# Altium PCB MAGI'sUSBASP.PcbDoc
Units mm, origin at the board's own origin, x right, y up, seen from the top; angles counter-clockwise.
Board outline 152.4 x 101.6 mm, 2 copper layers (Top Layer, Bottom Layer); 23 components, 22 nets, 105 pads, 26 vias.
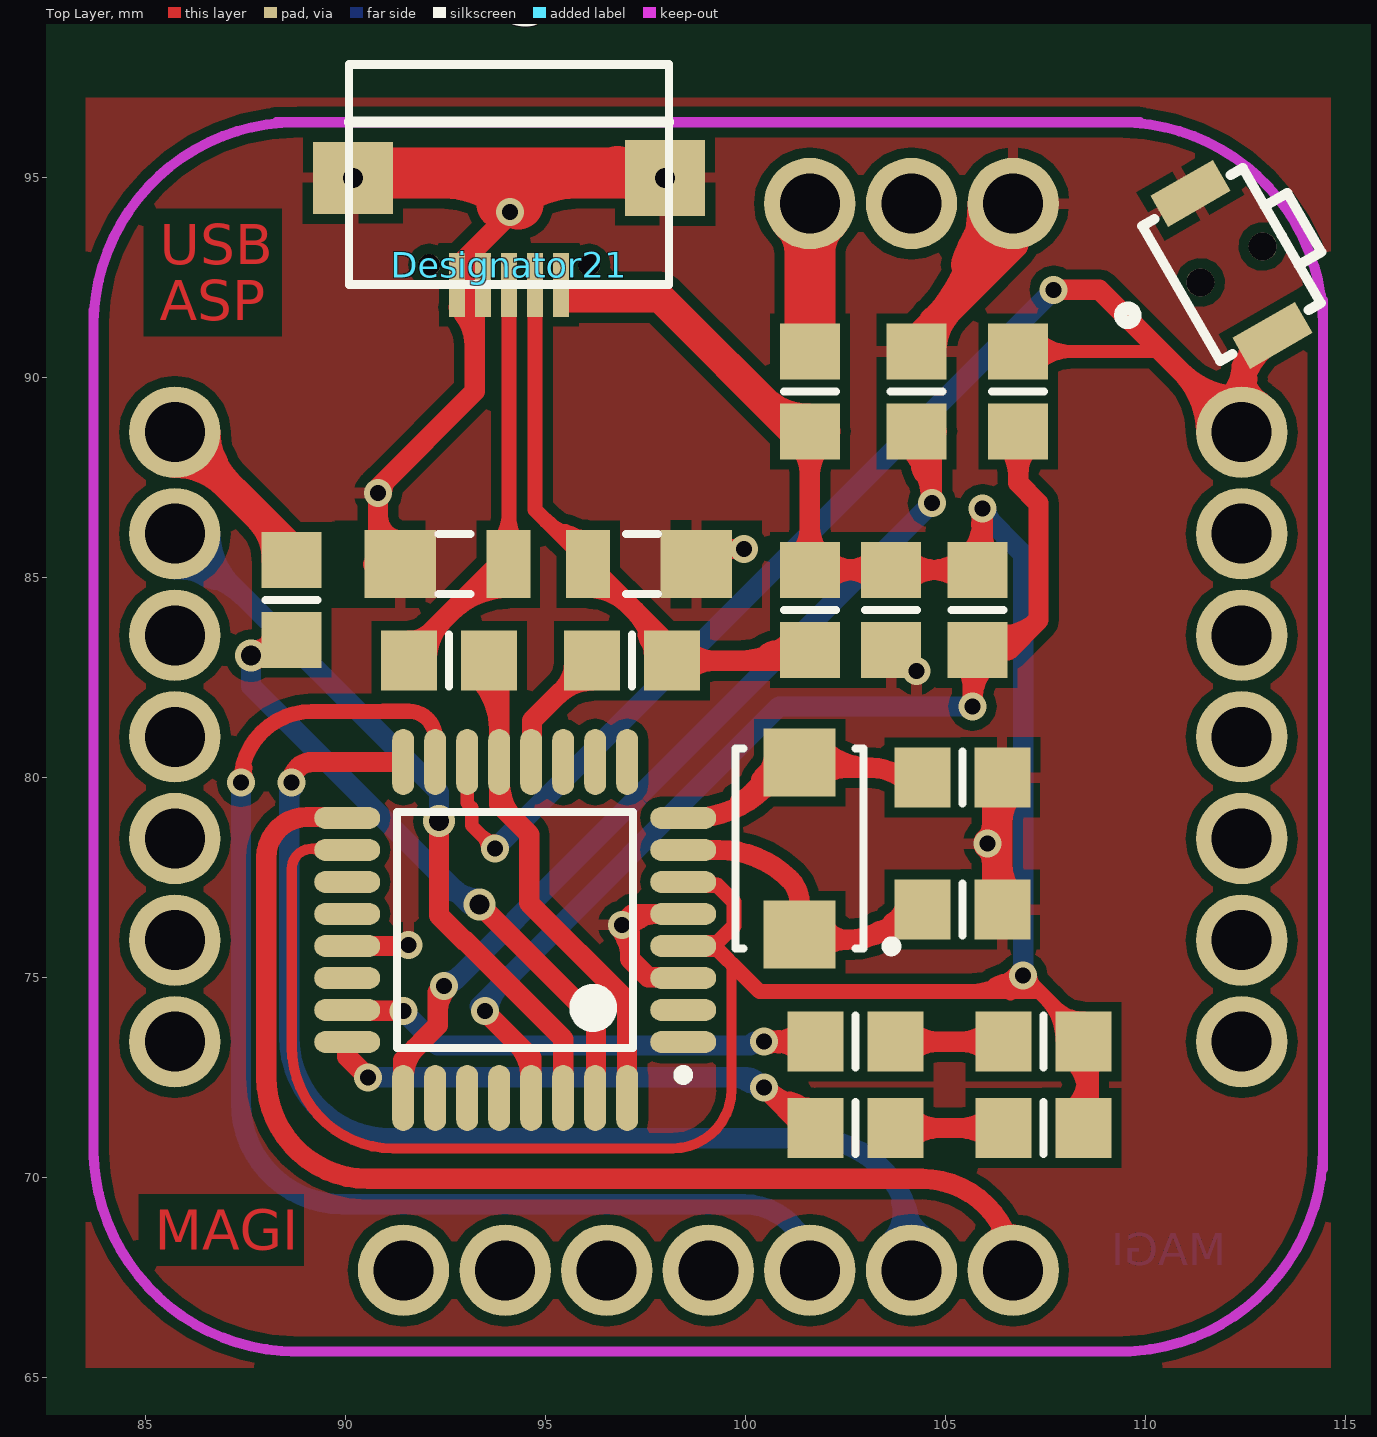
[diagram p0: Top Layer view]
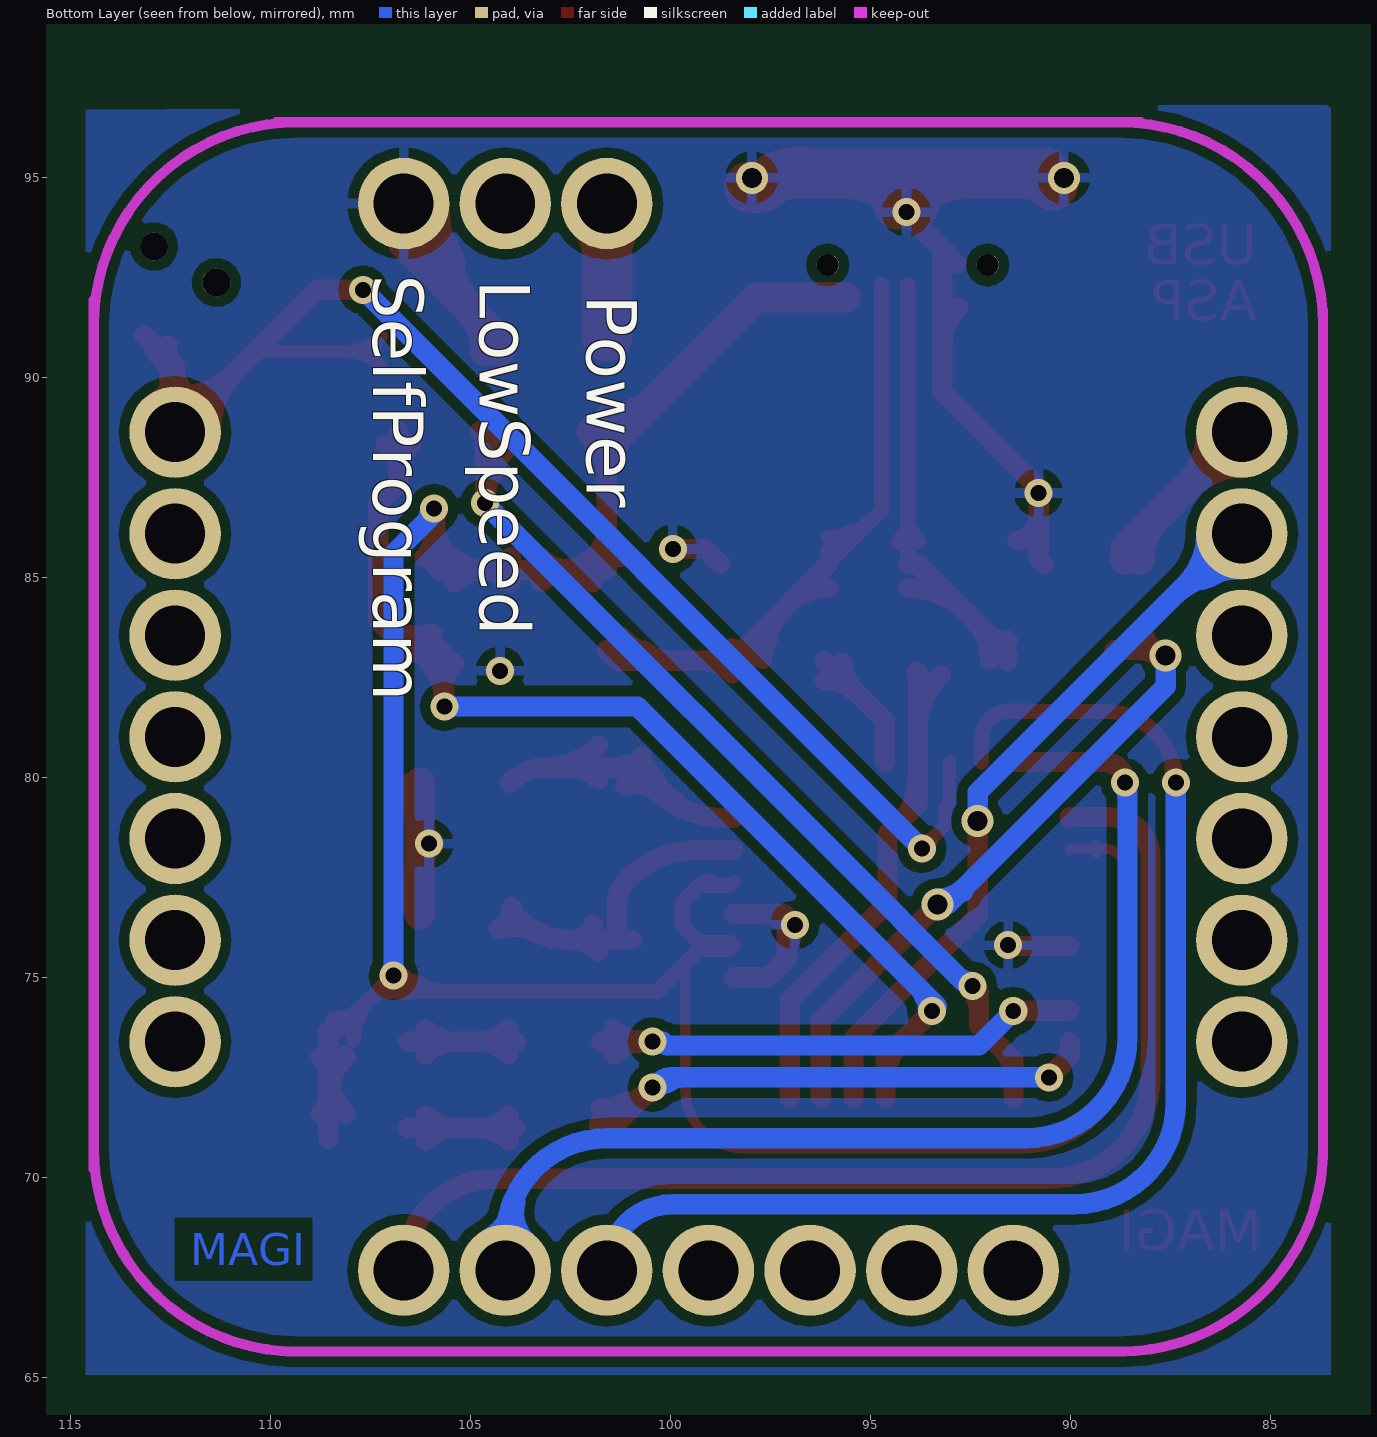
[diagram p1: Bottom Layer view, seen from below]

## Layer stack, top to bottom
Top Solder: solder mask 0.0102, Solder Resist, Dk 3.5
Top Layer: signal copper 0.0356
Dielectric1: dielectric 0.32, FR-4, Dk 4.8
Bottom Layer: signal copper 0.0356
Bottom Solder: solder mask 0.0102, Solder Resist, Dk 3.5

## Board outline
25.4,25.4 177.8,25.4 177.8,127 25.4,127

## Design rules (kind name [scope] priority, off if disabled: settings)
Clearance [All] p1: gap=0.254
PolygonConnect [All] p1: connectstyle=Relief reliefconductorwidth=0.254 reliefentries=4 polygonreliefangle="90 Angle" airgapwidth=0.254
RoutingVias [All] p1: holewidth=0.711 width=1.27 viastyle="Through Hole" minholewidth=0.025 minwidth=0.025 maxholewidth=2.54 maxwidth=2.54
SolderMaskExpansion [All] p1: expansion=0.102
Width [All] p1: maxlimit=2.54 minlimit=0.254 preferedwidth=0.762
29 further rules are at their usual default settings.

## Classes and differential pairs
component class usbasp: C1 C2 C3 J1 J2 J3 LED1 LED2 R0 R1 R2 R3 R4 R5 R6 R7 U1 Y1 ZD1 ZD2

## Components (designator, comment, footprint, x,y, rotation, side; value= is the part's Value field where it differs from the comment)
C1 "CAP_1" 6-0805_M 105.41,80.01 r180 top
C2 "CAP_1" 6-0805_M 105.41,76.708 r180 top
C3 "CAP_1" 6-0805_M 103.632,84.201 r90 top
Designator21 "Comment" MicroUSB#1 94.08,92.925 r0 top
J1 "CON2" 6-0805_M 104.267,89.662 r90 top
J2 "CON2" 6-0805_M 106.807,89.662 r270 top
J3 "MAGI-M8" MAGI-M8 99.06,81.026 r0 top
LED1 "LED_1" 6-0805_M 107.442,73.406 r180 top
LED2 "LED_1" 6-0805_M 107.442,71.247 r180 top
R0 "RES1" 6-0805_M 101.6,89.662 r270 top
R1 "RES1" 6-0805_M 102.743,73.406 r0 top
R2 "RES1" 6-0805_M 102.743,71.247 r0 top
R3 "RES1" 6-0805_M 105.791,84.201 r90 top
R4 "RES1" 6-0805_M 88.646,84.455 r90 top
R5 "RES1" 6-0805_M 92.583,82.931 r0 top
R6 "RES1" 6-0805_M 97.155,82.931 r180 top
R7 "RES1" 6-0805_M 101.6,84.201 r90 top
RESETButton "" SKRELGE010 112.141,92.837 r120 top
U1 "ATmega8A-AU" 32A_N 94.234,76.2 r180 top
Y1 "CRYSTAL" 4SMX 101.346,78.232 r90 top
ZD1 "DIODE SCHOTTKY_1" C1206 92.71,85.344 r0 top
ZD2 "DIODE SCHOTTKY_1" C1206 97.409,85.344 r180 top
? "Comment" MicroUSB#2 94.234,94.869 r0 top

## Footprints (in the part's own frame and the unit in brackets; to place one, negate y for a bottom-side part, rotate by r counter-clockwise, add the part's x,y. Pads: shape width x height; smd on the part's side, far side on the other; paste and mask are expansions set on the pad)
4SMX [mm] "Quartz Crystal, SM; Body 5.2 x 3.4 mm (LxW max)"
  rect 1.7x1.8 smd: 1(-2.15,0) 2(2.15,0)
  silkscreen extent -2.57,-2.42 2.5,1.6
6-0805_M [mm] "Chip Resistor, Body 2.0x1.2mm, IPC Low Density"
  rect 1.4x1.5 smd: 1(-1,0) 2(1,0)
  silkscreen extent 0,-0.65 0,0.65, body extent -1.07,-0.7 1.07,0.7, height 0.7
32A_N [mm] "Thin QFP, 32-Leads, Body 7x7mm, Pitch 0.8mm, IPC Medium Density"
  oval 1.65x0.55 smd: 1(-4.2,2.8) 2(-4.2,2) 3(-4.2,1.2) 4(-4.2,0.4) 5(-4.2,-0.4) 6(-4.2,-1.2) 7(-4.2,-2) 8(-4.2,-2.8) 17(4.2,-2.8) 18(4.2,-2) 19(4.2,-1.2) 20(4.2,-0.4) 21(4.2,0.4) 22(4.2,1.2) 23(4.2,2) 24(4.2,2.8)
  oval 0.55x1.65 smd: 9(-2.8,-4.2) 10(-2,-4.2) 11(-1.2,-4.2) 12(-0.4,-4.2) 13(0.4,-4.2) 14(1.2,-4.2) 15(2,-4.2) 16(2.8,-4.2) 25(2.8,4.2) 26(2,4.2) 27(1.2,4.2) 28(0.4,4.2) 29(-0.4,4.2) 30(-1.2,4.2) 31(-2,4.2) 32(-2.8,4.2)
  silkscreen extent -4.33,-2.95 2.95,3.75, body extent -3.5,-3.5 3.5,3.5, height 1.2
C1206 [mm] "Chip Capacitor, Body 3.2x1.6mm, IPC High Density"
  rect 1.778x1.7 smd: 1(-1.35,0)
  rect 1.1x1.7 smd: 2(1.35,0)
  silkscreen extent -0.4,-0.75 0.4,0.75, body extent -1.7,-0.9 1.7,0.9, height 1.3
MAGI-M8 [mil]
  round 90 hole 59.06: 1(300,525) 2(200,525) 3(100,525) 8(-525,300) 9(-525,200) 10(-525,100) 11(-525,0) 12(-525,-100) 13(-525,-200) 14(-525,-300) 15(-300,-525) 16(-200,-525) 17(-100,-525) 18(0,-525) 19(100,-525) 20(200,-525) 21(300,-525) 22(525,-300) 23(525,-200) 24(525,-100) 25(525,0) 26(525,100) 27(525,200) 28(525,300)
  Keep-Out Layer lines w10: -605,-415 -605,290 -605,420 ; -605,-405 ccw(c-405,-405) -405,-605 ; -605,405 cw(c-405,405) -405,605 ; -425,605 425,605 ; -410,-605 415,-605 ; 405,-605 ccw(c405,-405) 605,-405 ; 405,605 cw(c405,405) 605,405 ; 605,-425 605,430
MicroUSB#1 [mm]
  round 0.55 hole 0.55: 0(-2,-0.1) 0(2,-0.1)
  silkscreen extent -4,-0.58 4,4.92, body extent -4.1,-0.68 4.1,5.02, height 3
MicroUSB#2 [mm]
  rect 0.4x1.6 smd: 1(1.143,-2.54) 2(0.493,-2.54) 3(-0.157,-2.54) 4(-0.807,-2.54) 5(-1.457,-2.54)
  rect 2x1.8 smd: 6(-4.057,0.135)
  rect 2x1.9 smd: 7(3.743,0.135)
  silkscreen extent -4.16,-2.54 3.84,2.96, body extent -4.26,-2.64 3.94,3.06, height 3
SKRELGE010 [mm]
  round 0.7 hole 0.7: 0(0,-0.9) 0(0,0.9)
  rect 0.9x1.8 smd: 1(-2.05,0) 2(2.05,0)
  silkscreen extent -1.95,-2.1 1.95,1.45

## Part data
C1 C2 C3: "Capacitor"
J1 J2: "Connector"
RESETButton: library part CON2, "Connector"
U1: "8-bit AVR Microcontroller, 8KB Flash, 512 Bytes EEPROM, 1KB SRAM, 32-pin TQFP, Industrial Grade (-40癈 to 85癈)"
Y1: "Crystal"
ZD1 ZD2: "Schottky Diode"

## Via types
v1: diameter 0.7, hole 0.4, Top Layer to Bottom Layer, 21 vias
v2: diameter 0.8, hole 0.5, Top Layer to Bottom Layer, 5 vias

## Nets (pads, with @x,y where several pads share a name; then routed paths per layer and width w, separated by ;. In a path a pad name is that pad's centre, name@x,y a point inside that pad or via, vN(x,y) a via of type N, cw(c..) or ccw(c..) an arc to the next point about the centre after c; other vN are vias at no path point)
GND: ?.4 ?.5 ?.6 ?.7 C1.1 C2.1 C3.1 J1.2 J3.1 RESETButton.2 U1.3 U1.5 U1.21 ZD1.1 ZD2.1 | length 116.2
  Top Layer w0.508: U1.21 91.421,75.8 91.44,75.819 v1(91.567,75.819) ; ZD1.1@90.678,85.344 90.805,85.471 v1(90.805,87.122) 90.805,87.249 93.218,89.662 93.218,93.218 ; ?.5@92.86,92.86 93.218,93.218 ; 95.123,95.123 93.218,93.218 ; U1.3 98.417,75.017 97.56,75.017 97.101,75.476 97.101,76.127 v1(96.901,76.327) 97.174,76.6 U1.5 ; ZD2.1 99.14,85.725 v1(99.949,85.725) ; 90.805,86.542 ccw(c91.413,86.542) ZD1.1@91.333,85.939 ; 90.805,86.542 ccw(c91.413,86.542) ZD1.1@91.333,85.939 ; 90.805,86.542 ccw(c91.413,86.542) ZD1.1@91.333,85.939 ; v1@90.901,87.122 cw(c91.439,87.122) 91.059,87.503 ; v1@90.901,87.122 cw(c91.439,87.122) 91.059,87.503 ; v1@90.901,87.122 cw(c91.439,87.122) 91.059,87.503 ; ?.5@92.815,91.767 cw(c91.843,90.795) 93.218,90.795 ; ?.5@92.815,91.767 cw(c91.843,90.795) 93.218,90.795 ; ?.5@92.815,91.767 cw(c91.843,90.795) 93.218,90.795 ; v1@96.833,76.259 cw(c96.186,75.612) 97.101,75.612 ; v1@96.833,76.259 cw(c96.186,75.612) 97.101,75.612 ; v1@96.833,76.259 cw(c96.186,75.612) 97.101,75.612 ; v1@96.926,76.42 ccw(c97.068,76.949) 97.342,76.475 ; v1@96.926,76.42 ccw(c97.068,76.949) 97.342,76.475 ; v1@96.926,76.42 ccw(c97.068,76.949) 97.342,76.475 ; v1@96.969,76.259 cw(c97.792,75.436) U1.5@97.792,76.6 ; v1@96.969,76.259 cw(c97.792,75.436) U1.5@97.792,76.6 ; v1@96.969,76.259 cw(c97.792,75.436) U1.5@97.792,76.6 ; v1@96.993,76.301 ccw(c97.495,76.157) 97.043,75.896 ; v1@96.993,76.301 ccw(c97.495,76.157) 97.043,75.896 ; v1@96.993,76.301 ccw(c97.495,76.157) 97.043,75.896
  Top Layer w0.762: J1.2 104.267,90.932 106.68,93.345 J3.1 ; J3.1@105.947,94.154 cw(c105.245,93.957) 105.76,93.441 cw(c106.276,92.926) J3.1@106.473,93.628 ; C2.1@106.283,76.581 C1.1@106.283,79.883 ; J1.2@104.625,90.745 cw(c105.482,90.974) 104.714,91.417 ; J1.2@104.625,90.745 cw(c105.482,90.974) 104.714,91.417 ; J1.2@104.625,90.745 cw(c105.482,90.974) 104.714,91.417 ; J1.2@104.636,90.662 cw(c106.179,90.662) 105.088,91.753 ; J1.2@104.636,90.662 cw(c106.179,90.662) 105.088,91.753 ; J1.2@104.636,90.662 cw(c106.179,90.662) 105.088,91.753 ; J1.2@104.661,91.326 ccw(c101.626,94.361) J3.1@105.918,94.361 ; J1.2@104.661,91.326 ccw(c101.626,94.361) J3.1@105.918,94.361 ; J1.2@104.661,91.326 ccw(c101.626,94.361) J3.1@105.918,94.361 ; 105.509,92.835 cw(c107.936,92.185) J3.1 ; 105.509,92.835 cw(c107.936,92.185) J3.1 ; 105.509,92.835 cw(c107.936,92.185) J3.1 ; 105.962,92.627 ccw(c104.227,94.361) J3.1 ; 105.962,92.627 ccw(c104.227,94.361) J3.1 ; 105.962,92.627 ccw(c104.227,94.361) J3.1 ; v1@106.067,78.337 ccw(c105.545,78.859) 106.283,78.859 ; v1@106.067,78.337 ccw(c105.545,78.859) 106.283,78.859 ; v1@106.067,78.337 ccw(c105.545,78.859) 106.283,78.859 ; v1@106.067,78.381 cw(c105.545,77.859) 106.283,77.859 ; v1@106.067,78.381 cw(c105.545,77.859) 106.283,77.859 ; v1@106.067,78.381 cw(c105.545,77.859) 106.283,77.859 ; J3.1@106.16,93.804 cw(c105.698,93.31) 106.351,93.135 ; J3.1@106.16,93.804 cw(c105.698,93.31) 106.351,93.135 ; J3.1@106.16,93.804 cw(c105.698,93.31) 106.351,93.135 ; 106.283,77.835 ccw(c107.487,77.835) C2.1@106.636,76.984 ; 106.283,77.835 ccw(c107.487,77.835) C2.1@106.636,76.984 ; 106.283,77.835 ccw(c107.487,77.835) C2.1@106.636,76.984 ; 106.283,78.883 cw(c107.487,78.883) C1.1@106.636,79.734 ; 106.283,78.883 cw(c107.487,78.883) C1.1@106.636,79.734 ; 106.283,78.883 cw(c107.487,78.883) C1.1@106.636,79.734 ; 106.351,93.135 cw(c107.005,92.959) J3.1@106.852,93.619 ; 106.351,93.135 cw(c107.005,92.959) J3.1@106.852,93.619 ; 106.351,93.135 cw(c107.005,92.959) J3.1@106.852,93.619
  Top Layer w1.27: ?.6@90.637,95.123 96.756,95.123 ccw(c96.756,95.159) 96.792,95.159 ; ?.6@90.464,94.817 cw(c91.204,94.077) 91.204,95.123 ; ?.6@90.464,94.817 cw(c91.204,94.077) 91.204,95.123 ; ?.6@90.464,94.817 cw(c91.204,94.077) 91.204,95.123 ; 92.429,95.123 cw(c92.429,92.465) v1@94.309,94.345 ; 92.429,95.123 cw(c92.429,92.465) v1@94.309,94.345 ; 92.429,95.123 cw(c92.429,92.465) v1@94.309,94.345 ; v1@93.905,94.345 cw(c95.785,92.465) 95.785,95.123 ; v1@93.905,94.345 cw(c95.785,92.465) 95.785,95.123 ; v1@93.905,94.345 cw(c95.785,92.465) 95.785,95.123 ; 96.879,95.123 cw(c96.879,93.956) ?.7@97.704,94.781 ; 96.879,95.123 cw(c96.879,93.956) ?.7@97.704,94.781 ; 96.879,95.123 cw(c96.879,93.956) ?.7@97.704,94.781 ; 96.879,95.123 cw(c96.879,93.956) ?.7@97.704,94.781 ; 96.879,95.123 cw(c96.879,93.956) ?.7@97.704,94.781 ; 96.879,95.123 cw(c96.879,93.956) ?.7@97.704,94.781 ; ?.7@97.615,94.833 ccw(c97.894,95.315) ?.7@98.038,94.777 ; ?.7@97.615,94.833 ccw(c97.894,95.315) ?.7@98.038,94.777 ; ?.7@97.615,94.833 ccw(c97.894,95.315) ?.7@98.038,94.777 ; ?.7@97.615,94.833 ccw(c97.894,95.315) ?.7@98.038,94.777 ; ?.7@97.615,94.833 ccw(c97.894,95.315) ?.7@98.038,94.777 ; ?.7@97.615,94.833 ccw(c97.894,95.315) ?.7@98.038,94.777 ; ?.7@97.615,94.833 ccw(c97.894,95.315) ?.7@98.038,94.777 ; ?.7@97.615,94.833 ccw(c97.894,95.315) ?.7@98.038,94.777 ; ?.7@97.615,94.833 ccw(c97.894,95.315) ?.7@98.038,94.777 ; ?.7@97.615,94.833 ccw(c97.894,95.315) ?.7@98.038,94.777 ; ?.7@97.615,94.833 ccw(c97.894,95.315) ?.7@98.038,94.777 ; ?.7@97.615,94.833 ccw(c97.894,95.315) ?.7@98.038,94.777
  other v1: 106.045,78.359 104.267,82.677 94.107,94.143
  other v2: 90.177,95.004 97.977,95.004
MISO: J3.20 U1.16 | length 36.4
  Top Layer w0.508: v1(88.646,79.883) cw(c89.163,79.883) 89.163,80.4 U1.16
  Bottom Layer w0.508: v1@88.582,79.742 88.582,73.533 ccw(c91.123,73.533) 91.123,70.993 101.6,70.993 cw(c101.6,68.453) 104.14,68.453 J3.20 ; 88.582,79.498 cw(c89.031,79.498) v1@88.714,79.815 ; 88.582,79.498 cw(c89.031,79.498) v1@88.714,79.815 ; 88.582,79.498 cw(c89.031,79.498) v1@88.714,79.815 ; J3.20@103.567,68.371 ccw(c102.923,69.134) 103.888,69.393 ; J3.20@103.567,68.371 ccw(c102.923,69.134) 103.888,69.393 ; J3.20@103.567,68.371 ccw(c102.923,69.134) 103.888,69.393 ; 103.898,69.355 ccw(c105.321,69.736) J3.20@104.584,68.461 ; 103.898,69.355 ccw(c105.321,69.736) J3.20@104.584,68.461 ; 103.898,69.355 ccw(c105.321,69.736) J3.20@104.584,68.461
MOSI: J3.19 U1.15 | length 33.7
  Top Layer w0.381: v1(87.376,79.883) cw(c89.154,79.883) 89.154,81.661 91.313,81.661 ; 90.932,81.669 91.567,81.669 cw(c91.567,81.002) 92.234,81.002 U1.15 ; v1@87.296,80.021 ccw(c87.104,80.355) 87.476,80.255 ; v1@87.296,80.021 ccw(c87.104,80.355) 87.476,80.255 ; v1@87.296,80.021 ccw(c87.104,80.355) 87.476,80.255 ; 87.476,80.255 ccw(c87.848,80.155) v1@87.514,79.963 ; 87.476,80.255 ccw(c87.848,80.155) v1@87.514,79.963 ; 87.476,80.255 ccw(c87.848,80.155) v1@87.514,79.963
  Bottom Layer w0.508: v1(87.376,79.883) 87.376,71.882 ccw(c89.916,71.882) 89.916,69.342 99.949,69.342 cw(c99.949,67.691) J3.19
NetC1_2: C1.2 U1.8 Y1.2 | length 22
  Top Layer w0.508: U1.8 98.658,79 ccw(c98.658,81.54) Y1.2@100.454,79.744 ; Y1.2@100.965,80.255 103.131,80.255 ; C1.2@104.029,79.883 ccw(c103.131,78.985) 103.131,80.255 ; 99.841,79.39 ccw(c98.897,81.025) Y1.2@100.72,80.536 ; 99.841,79.39 ccw(c98.897,81.025) Y1.2@100.72,80.536 ; 99.841,79.39 ccw(c98.897,81.025) Y1.2@100.72,80.536 ; 100.383,79.952 cw(c101.043,79.571) Y1.2@101.27,80.298 ; 100.383,79.952 cw(c101.043,79.571) Y1.2@101.27,80.298 ; 100.383,79.952 cw(c101.043,79.571) Y1.2@101.27,80.298 ; 100.391,79.707 cw(c100.886,78.85) Y1.2@101.142,79.806 ; 100.391,79.707 cw(c100.886,78.85) Y1.2@101.142,79.806 ; 100.391,79.707 cw(c100.886,78.85) Y1.2@101.142,79.806 ; Y1.2@101.817,79.961 cw(c102.528,79.25) 102.528,80.255 ; Y1.2@101.817,79.961 cw(c102.528,79.25) 102.528,80.255 ; Y1.2@101.817,79.961 cw(c102.528,79.25) 102.528,80.255 ; Y1.2@101.819,80.802 ccw(c103.131,82.102) 103.131,80.255 ; Y1.2@101.819,80.802 ccw(c103.131,82.102) 103.131,80.255 ; Y1.2@101.819,80.802 ccw(c103.131,82.102) 103.131,80.255
NetC2_2: C2.2 U1.7 Y1.1 | length 19.2
  Top Layer w0.508: U1.7 99.33,78.2 cw(c99.33,75.708) 101.092,77.47 cw(c100.479,76.857) 101.346,76.857 Y1.1 ; Y1.1@100.965,75.955 102.518,75.955 ; C2.2@104.029,76.581 cw(c102.518,78.092) 102.518,75.955 ; Y1.1@101.82,75.663 cw(c102.518,74.975) 102.518,75.955 ; Y1.1@101.82,75.663 cw(c102.518,74.975) 102.518,75.955 ; Y1.1@101.82,75.663 cw(c102.518,74.975) 102.518,75.955 ; Y1.1@101.939,76.328 ccw(c102.518,76.591) 102.518,75.955 ; Y1.1@101.939,76.328 ccw(c102.518,76.591) 102.518,75.955 ; Y1.1@101.939,76.328 ccw(c102.518,76.591) 102.518,75.955 ; 103.157,76.077 cw(c103.906,74.779) C2.2@104.295,76.227 ; 103.157,76.077 cw(c103.906,74.779) C2.2@104.295,76.227 ; 103.157,76.077 cw(c103.906,74.779) C2.2@104.295,76.227 ; 103.518,76.227 ccw(c103.518,76.673) C2.2@103.964,76.665 ; 103.518,76.227 ccw(c103.518,76.673) C2.2@103.964,76.665 ; 103.518,76.227 ccw(c103.518,76.673) C2.2@103.964,76.665 ; 103.674,76.376 ccw(c103.347,76.943) C2.2@103.979,76.773 ; 103.674,76.376 ccw(c103.347,76.943) C2.2@103.979,76.773 ; 103.674,76.376 ccw(c103.347,76.943) C2.2@103.979,76.773
NetJ1_1: J1.1 U1.25 | length 36.3
  Top Layer w0.508: U1.25 91.434,72.949 92.298,73.813 92.298,74.645 v1@92.329,74.676 ; U1.25@91.455,72.55 cw(c92.468,72.55) 91.752,73.266 ; v1(104.648,86.868) 104.648,88.535 J1.1@104.775,88.662 ; 92.298,74.19 cw(c93.069,74.19) v1@92.524,74.735 ; 92.298,74.19 cw(c93.069,74.19) v1@92.524,74.735 ; 92.298,74.19 cw(c93.069,74.19) v1@92.524,74.735 ; 92.351,74.436 ccw(c92.038,74.617) v1@92.368,74.764 ; 92.351,74.436 ccw(c92.038,74.617) v1@92.368,74.764 ; 92.351,74.436 ccw(c92.038,74.617) v1@92.368,74.764 ; J1.1@104.008,88.34 cw(c102.564,86.838) v1@104.648,86.838 ; J1.1@104.008,88.34 cw(c102.564,86.838) v1@104.648,86.838 ; J1.1@104.008,88.34 cw(c102.564,86.838) v1@104.648,86.838 ; J1.1@104.36,88.707 cw(c103.71,88.03) J1.1@104.648,88.03 ; J1.1@104.36,88.707 cw(c103.71,88.03) J1.1@104.648,88.03 ; J1.1@104.36,88.707 cw(c103.71,88.03) J1.1@104.648,88.03 ; 104.449,87.611 cw(c104.899,87.883) J1.1@104.584,88.305 ; 104.449,87.611 cw(c104.899,87.883) J1.1@104.584,88.305 ; 104.449,87.611 cw(c104.899,87.883) J1.1@104.584,88.305
  Bottom Layer w0.508: v1@92.717,74.93 94.246,76.459 94.246,76.466 v1(104.648,86.868) ; v1@92.456,74.899 ccw(c92.456,75.454) 92.849,75.062 ; v1@92.456,74.899 ccw(c92.456,75.454) 92.849,75.062 ; v1@92.456,74.899 ccw(c92.456,75.454) 92.849,75.062
  other v1: 92.456,74.803
NetJ2_2: J2.2 R3.1 U1.29 | length 50.2
  Top Layer w0.508: v1(93.472,74.168) 94.634,73.006 U1.29 ; 94.276,73.364 cw(c93.461,72.55) U1.29@94.613,72.55 ; v1(105.664,81.788) 105.664,83.074 R3.1 ; 106.553,83.185 107.315,83.947 ; J2.2 106.807,87.376 107.315,86.868 107.315,83.947 ; R3.1@105.426,82.886 cw(c104.85,82.31) 105.664,82.31 ; R3.1@105.426,82.886 cw(c104.85,82.31) 105.664,82.31 ; R3.1@105.426,82.886 cw(c104.85,82.31) 105.664,82.31 ; v1@105.664,81.938 cw(c107.004,81.938) R3.1@106.056,82.886 ; v1@105.664,81.938 cw(c107.004,81.938) R3.1@106.056,82.886 ; v1@105.664,81.938 cw(c107.004,81.938) R3.1@106.056,82.886 ; R3.1@105.799,83.247 cw(c106.685,82.266) 106.752,83.586 ; R3.1@105.799,83.247 cw(c106.685,82.266) 106.752,83.586 ; R3.1@105.799,83.247 cw(c106.685,82.266) 106.752,83.586 ; R3.1@105.822,83.142 ccw(c106.097,83.991) 106.728,83.36 ; R3.1@105.822,83.142 ccw(c106.097,83.991) 106.728,83.36 ; R3.1@105.822,83.142 ccw(c106.097,83.991) 106.728,83.36 ; R3.1@105.978,83.625 ccw(c106.384,84.878) 107.315,83.947 ; R3.1@105.978,83.625 ccw(c106.384,84.878) 107.315,83.947 ; R3.1@105.978,83.625 ccw(c106.384,84.878) 107.315,83.947 ; J2.2@106.492,88.347 cw(c105.73,87.585) 106.807,87.585 ; J2.2@106.492,88.347 cw(c105.73,87.585) 106.807,87.585 ; J2.2@106.492,88.347 cw(c105.73,87.585) 106.807,87.585 ; 106.807,87.585 cw(c107.884,87.585) J2.2@107.122,88.347 ; 106.807,87.585 cw(c107.884,87.585) J2.2@107.122,88.347 ; 106.807,87.585 cw(c107.884,87.585) J2.2@107.122,88.347
  Bottom Layer w0.508: v1(93.472,74.168) 93.345,74.295 100.838,81.788 v1@105.41,81.788 ; v1@93.424,74.251 ccw(c93.15,74.726) 93.679,74.584 ; v1@93.424,74.251 ccw(c93.15,74.726) 93.679,74.584 ; v1@93.424,74.251 ccw(c93.15,74.726) 93.679,74.584 ; v1@93.568,74.168 cw(c94.413,74.168) 93.815,74.765 ; v1@93.568,74.168 cw(c94.413,74.168) 93.815,74.765 ; v1@93.568,74.168 cw(c94.413,74.168) 93.815,74.765
NetJ3_3: J3.3 R0.1 | length 9.1
  Top Layer w1.27: R0.1@101.6,91.043 J3.3 ; J3.3@101.241,94.002 cw(c100.374,93.135) 101.6,93.135 ; J3.3@101.241,94.002 cw(c100.374,93.135) 101.6,93.135 ; J3.3@101.241,94.002 cw(c100.374,93.135) 101.6,93.135 ; 101.6,93.135 cw(c102.826,93.135) J3.3@101.959,94.002 ; 101.6,93.135 cw(c102.826,93.135) J3.3@101.959,94.002 ; 101.6,93.135 cw(c102.826,93.135) J3.3@101.959,94.002
NetLED1_2: LED1.2 R1.2 | length 12.8
  Top Layer w0.508: R1.2@103.87,73.406 LED1.2@106.569,73.406 ; R1.2@104.058,73.091 cw(c104.82,72.329) 104.82,73.406 ; R1.2@104.058,73.091 cw(c104.82,72.329) 104.82,73.406 ; R1.2@104.058,73.091 cw(c104.82,72.329) 104.82,73.406 ; R1.2@104.058,73.721 ccw(c104.82,74.483) 104.82,73.406 ; R1.2@104.058,73.721 ccw(c104.82,74.483) 104.82,73.406 ; R1.2@104.058,73.721 ccw(c104.82,74.483) 104.82,73.406 ; 105.365,73.406 cw(c105.365,72.329) LED1.2@106.127,73.091 ; 105.365,73.406 ccw(c105.365,74.483) LED1.2@106.127,73.721 ; 105.365,73.406 cw(c105.365,72.329) LED1.2@106.127,73.091 ; 105.365,73.406 ccw(c105.365,74.483) LED1.2@106.127,73.721 ; 105.365,73.406 ccw(c105.365,74.483) LED1.2@106.127,73.721 ; 105.365,73.406 cw(c105.365,72.329) LED1.2@106.127,73.091
NetLED2_2: LED2.2 R2.2 | length 12.8
  Top Layer w0.508: R2.2@103.87,71.247 LED2.2@106.569,71.247 ; R2.2@104.058,70.932 cw(c104.82,70.17) 104.82,71.247 ; R2.2@104.058,70.932 cw(c104.82,70.17) 104.82,71.247 ; R2.2@104.058,70.932 cw(c104.82,70.17) 104.82,71.247 ; R2.2@104.058,71.562 ccw(c104.82,72.324) 104.82,71.247 ; R2.2@104.058,71.562 ccw(c104.82,72.324) 104.82,71.247 ; R2.2@104.058,71.562 ccw(c104.82,72.324) 104.82,71.247 ; 105.365,71.247 cw(c105.365,70.17) LED2.2@106.127,70.932 ; 105.365,71.247 ccw(c105.365,72.324) LED2.2@106.127,71.562 ; 105.365,71.247 cw(c105.365,70.17) LED2.2@106.127,70.932 ; 105.365,71.247 ccw(c105.365,72.324) LED2.2@106.127,71.562 ; 105.365,71.247 ccw(c105.365,72.324) LED2.2@106.127,71.562 ; 105.365,71.247 cw(c105.365,70.17) LED2.2@106.127,70.932
NetR1_1: R1.1 U1.23 | length 22.4
  Top Layer w0.508: U1.23 90.051,74.183 91.425,74.183 v1(91.44,74.168) ; v1(100.457,73.406) R1.1 ; v1@100.505,73.323 cw(c100.713,72.962) 100.821,73.364 ; v1@100.505,73.323 cw(c100.713,72.962) 100.821,73.364 ; v1@100.505,73.323 cw(c100.713,72.962) 100.821,73.364 ; v1@100.505,73.323 cw(c100.713,72.962) 100.821,73.364 ; v1@100.505,73.323 cw(c100.713,72.962) 100.821,73.364 ; v1@100.505,73.323 cw(c100.713,72.962) 100.821,73.364 ; v1@100.505,73.489 ccw(c100.713,73.85) 100.821,73.448 ; v1@100.505,73.489 ccw(c100.713,73.85) 100.821,73.448 ; v1@100.505,73.489 ccw(c100.713,73.85) 100.821,73.448 ; v1@100.505,73.489 ccw(c100.713,73.85) 100.821,73.448 ; v1@100.505,73.489 ccw(c100.713,73.85) 100.821,73.448 ; v1@100.505,73.489 ccw(c100.713,73.85) 100.821,73.448 ; v1@100.666,73.406 cw(c100.666,72.329) R1.1@101.428,73.091 ; v1@100.666,73.406 ccw(c100.666,74.483) R1.1@101.428,73.721 ; v1@100.666,73.406 cw(c100.666,72.329) R1.1@101.428,73.091 ; v1@100.666,73.406 ccw(c100.666,74.483) R1.1@101.428,73.721 ; v1@100.666,73.406 ccw(c100.666,74.483) R1.1@101.428,73.721 ; v1@100.666,73.406 cw(c100.666,72.329) R1.1@101.428,73.091
  Bottom Layer w0.508: v1(91.44,74.168) 92.298,73.31 100.107,73.31 100.203,73.406 v1(100.457,73.406) ; 99.993,73.31 ccw(c99.993,73.87) v1@100.389,73.474 ; 99.993,73.31 ccw(c99.993,73.87) v1@100.389,73.474 ; 99.993,73.31 ccw(c99.993,73.87) v1@100.389,73.474
NetR2_1: R2.1 U1.24 | length 24.7
  Top Layer w0.508: U1.24 90.034,73.034 v1(90.551,72.517) ; R2.1 101.473,71.247 v1(100.457,72.263) ; v1(100.457,72.263) ccw(c101.713,73.519) R2.1@101.737,71.743 ; v1(100.457,72.263) ccw(c101.713,73.519) R2.1@101.737,71.743 ; v1(100.457,72.263) ccw(c101.713,73.519) R2.1@101.737,71.743 ; R2.1@101.103,71.904 cw(c100.845,70.886) R2.1@101.799,71.323 ; R2.1@101.103,71.904 cw(c100.845,70.886) R2.1@101.799,71.323 ; R2.1@101.103,71.904 cw(c100.845,70.886) R2.1@101.799,71.323
  Bottom Layer w0.508: v1(90.551,72.517) 100.013,72.517 ; 99.612,72.517 cw(c99.612,71.418) v1@100.389,72.195 ; 99.612,72.517 cw(c99.612,71.418) v1@100.389,72.195 ; 99.612,72.517 cw(c99.612,71.418) v1@100.389,72.195 ; 100.013,72.517 cw(c100.013,72.156) v1@100.364,72.24 ; 100.013,72.517 cw(c100.013,72.156) v1@100.364,72.24 ; 100.013,72.517 cw(c100.013,72.156) v1@100.364,72.24 ; 100.016,72.411 ccw(c100.29,72.885) v1@100.432,72.356 ; 100.016,72.411 ccw(c100.29,72.885) v1@100.432,72.356 ; 100.016,72.411 ccw(c100.29,72.885) v1@100.432,72.356
NetR4_1: R4.1 U1.31 | length 24.4
  Top Layer w0.508: v2(87.63,83.058) cw(c87.773,83.058) v2@87.773,83.201 ; R4.1@88.9,83.201 v2@87.773,83.201 ; v2(93.338,76.835) 93.345,76.835 96.251,73.929 96.251,72.017 U1.31 ; v2@87.733,82.955 cw(c88.328,82.36) R4.1@88.328,83.201 ; v2@87.733,82.955 cw(c88.328,82.36) R4.1@88.328,83.201 ; v2@87.733,82.955 cw(c88.328,82.36) R4.1@88.328,83.201 ; v2@87.773,83.201 ccw(c87.773,83.589) R4.1@88.156,83.527 ; v2@87.773,83.201 ccw(c87.773,83.589) R4.1@88.156,83.527 ; v2@87.773,83.201 ccw(c87.773,83.589) R4.1@88.156,83.527
  Bottom Layer w0.508: v2(87.63,83.058) 87.63,82.296 93.091,76.835 v2(93.338,76.835) ; 92.906,77.067 ccw(c93.176,77.337) v2@93.293,76.974 ; 92.667,77.259 ccw(c93.338,77.93) v2@93.338,76.981 ; 92.667,77.259 ccw(c93.338,77.93) v2@93.338,76.981 ; 92.667,77.259 ccw(c93.338,77.93) v2@93.338,76.981 ; 92.705,77.151 cw(c92.489,76.345) v2@93.212,76.762 ; 92.705,77.151 cw(c92.489,76.345) v2@93.212,76.762 ; 92.705,77.151 cw(c92.489,76.345) v2@93.212,76.762
NetR5_1: ?.3 R5.1 ZD1.2 | length 24.4
  Top Layer w0.381: ZD1.2 94.077,85.361 ?.3 ; ZD1.2@93.806,85.898 ccw(c93.151,86.553) 94.077,86.553 ; ZD1.2@93.806,85.898 ccw(c93.151,86.553) 94.077,86.553 ; ZD1.2@93.806,85.898 ccw(c93.151,86.553) 94.077,86.553 ; 94.077,86.471 ccw(c94.887,86.471) ZD1.2@94.314,85.898 ; 94.077,86.471 ccw(c94.887,86.471) ZD1.2@94.314,85.898 ; 94.077,86.471 ccw(c94.887,86.471) ZD1.2@94.314,85.898
  Top Layer w0.508: R5.1 91.583,83.099 93.828,85.344 ZD1.2 ; R5.1@91.583,83.427 ccw(c91.583,84.218) R5.1@92.142,83.659 ; R5.1@91.583,83.427 ccw(c91.583,84.218) R5.1@92.142,83.659 ; R5.1@91.583,83.427 ccw(c91.583,84.218) R5.1@92.142,83.659 ; R5.1@92.029,82.981 cw(c93.392,82.981) 92.428,83.945 ; R5.1@92.029,82.981 cw(c93.392,82.981) 92.428,83.945 ; R5.1@92.029,82.981 cw(c93.392,82.981) 92.428,83.945 ; 92.646,84.162 cw(c94.06,82.748) ZD1.2@94.06,84.748 ; 92.646,84.162 cw(c94.06,82.748) ZD1.2@94.06,84.748 ; 92.646,84.162 cw(c94.06,82.748) ZD1.2@94.06,84.748
NetR6_1: ?.2 R6.1 R7.1 ZD2.2 | length 42.4
  Top Layer w0.381: ?.2 94.727,86.706 96.059,85.374 ZD2.2 ; 94.984,86.449 ccw(c96.059,87.524) ZD2.2@96.059,86.003 ; 94.984,86.449 ccw(c96.059,87.524) ZD2.2@96.059,86.003 ; 94.984,86.449 ccw(c96.059,87.524) ZD2.2@96.059,86.003 ; 95.489,86.156 cw(c95.256,85.287) ZD2.2@96.079,85.653 ; 95.489,86.156 cw(c95.256,85.287) ZD2.2@96.079,85.653 ; 95.489,86.156 cw(c95.256,85.287) ZD2.2@96.079,85.653
  Top Layer w0.508: ZD2.2 98.155,83.248 R6.1 101.33,82.931 R7.1 ; ZD2.2@96.059,84.748 cw(c96.059,83.309) 97.076,84.327 ; ZD2.2@96.059,84.748 cw(c96.059,83.309) 97.076,84.327 ; ZD2.2@96.059,84.748 cw(c96.059,83.309) 97.076,84.327 ; 97.205,84.198 cw(c95.988,82.981) R6.1@97.709,82.981 ; 97.205,84.198 cw(c95.988,82.981) R6.1@97.709,82.981 ; 97.205,84.198 cw(c95.988,82.981) R6.1@97.709,82.981 ; R6.1@97.548,83.582 ccw(c98.498,83.836) R6.1@98.132,82.923 ; R6.1@97.548,83.582 ccw(c98.498,83.836) R6.1@98.132,82.923 ; R6.1@97.548,83.582 ccw(c98.498,83.836) R6.1@98.132,82.923 ; R6.1@98.47,82.616 cw(c99.232,81.854) 99.232,82.931 ; R6.1@98.47,82.616 cw(c99.232,81.854) 99.232,82.931 ; R6.1@98.47,82.616 cw(c99.232,81.854) 99.232,82.931 ; R6.1@98.47,83.246 ccw(c99.232,84.008) 99.232,82.931 ; R6.1@98.47,83.246 ccw(c99.232,84.008) 99.232,82.931 ; R6.1@98.47,83.246 ccw(c99.232,84.008) 99.232,82.931 ; 99.821,82.931 ccw(c99.821,84.93) R7.1@101.235,83.516 ; 99.821,82.931 ccw(c99.821,84.93) R7.1@101.235,83.516 ; 99.821,82.931 ccw(c99.821,84.93) R7.1@101.235,83.516 ; 100.554,83.123 cw(c100.782,82.729) R7.1@101.17,82.967 ; 100.554,83.123 cw(c100.782,82.729) R7.1@101.17,82.967 ; 100.554,83.123 cw(c100.782,82.729) R7.1@101.17,82.967
PB0: R6.2 U1.12 | length 8.2
  Top Layer w0.508: U1.12 94.651,80.417 94.651,81.427 R6.2 ; 95.308,82.084 cw(c96.155,81.238) R6.2@96.155,82.435 ; 95.308,82.084 cw(c96.155,81.238) R6.2@96.155,82.435 ; 95.308,82.084 cw(c96.155,81.238) R6.2@96.155,82.435 ; 95.429,82.205 ccw(c94.753,82.881) R6.2@95.709,82.881 ; 95.429,82.205 ccw(c94.753,82.881) R6.2@95.709,82.881 ; 95.429,82.205 ccw(c94.753,82.881) R6.2@95.709,82.881
PB1: R5.2 U1.13 U1.32 | length 16
  Top Layer w0.508: R5.2@93.853,82.661 93.834,82.642 U1.13 93.834,79.337 94.584,78.587 94.584,76.873 97.028,74.429 97.028,72.006 U1.32 ; U1.13@93.855,79.85 ccw(c95.143,79.85) 94.232,78.939 ; R5.2@93.268,82.566 cw(c91.9,81.198) 93.834,81.198 ccw(c91.9,81.198) R5.2@93.268,82.566
RST: J2.1 J3.28 RESETButton.1 U1.14 | length 53.2
  Top Layer w0.33: U1.14 93.034,79.374 93.148,79.26 93.148,78.81 v1(93.726,78.232) ; 110.363,90.678 110.347,90.662 107.569,90.662 ; 93.41,78.548 cw(c93.095,78.232) v1@93.541,78.232 ; 93.41,78.548 ccw(c93.726,78.863) v1@93.726,78.417 ; 93.41,78.548 ccw(c93.726,78.863) v1@93.726,78.417 ; 93.41,78.548 cw(c93.095,78.232) v1@93.541,78.232 ; 93.41,78.548 cw(c93.095,78.232) v1@93.541,78.232 ; 93.41,78.548 ccw(c93.726,78.863) v1@93.726,78.417 ; J2.1@107.235,90.284 cw(c108.148,89.371) 108.148,90.662 ; J2.1@107.235,90.284 cw(c108.148,89.371) 108.148,90.662 ; J2.1@107.235,90.284 cw(c108.148,89.371) 108.148,90.662 ; J2.1@107.235,91.04 ccw(c108.148,91.953) 108.148,90.662 ; J2.1@107.235,91.04 ccw(c108.148,91.953) 108.148,90.662 ; J2.1@107.235,91.04 ccw(c108.148,91.953) 108.148,90.662 ; J2.1@107.371,90.513 cw(c107.569,90.456) 107.569,90.662 ; J2.1@107.371,90.513 cw(c107.569,90.456) 107.569,90.662 ; J2.1@107.371,90.513 cw(c107.569,90.456) 107.569,90.662 ; J2.1@107.371,90.811 ccw(c107.569,90.868) 107.569,90.662 ; J2.1@107.371,90.811 ccw(c107.569,90.868) 107.569,90.662 ; J2.1@107.371,90.811 ccw(c107.569,90.868) 107.569,90.662
  Top Layer w0.508: v1(107.696,92.202) 108.839,92.202 110.363,90.678 J3.28 112.395,90.291 ; J3.28@111.506,88.646 ccw(c109.36,88.646) 110.877,90.164 ccw(c112.395,91.681) J3.28@112.395,89.535 ; J3.28@111.908,89.39 ccw(c111.318,90.291) 112.395,90.291 ; J3.28@112.081,89.478 ccw(c111.816,90.18) 112.54,89.985 ccw(c112.992,89.864) J3.28@112.786,89.444 ; J3.28@112.395,89.443 cw(c114.17,89.443) RESETButton.1@112.915,90.698 ; 112.395,90.171 cw(c112.872,90.171) RESETButton.1@112.804,90.643 ; RESETButton.1@112.581,90.816 cw(c111.937,90.749) 112.395,90.291 ; J3.28@112.882,89.39 cw(c113.472,90.291) 112.395,90.291 ; RESETButton.1 112.395,90.291
  Bottom Layer w0.508: v1(93.726,78.232) v1(107.696,92.202)
RXD: J3.9 U1.30 | length 28.6
  Top Layer w0.508: v2(92.329,78.921) 92.329,76.56 92.962,75.927 92.983,75.927 95.434,73.476 U1.30
  Bottom Layer w0.508: J3.9@85.602,86.074 ccw(c87.125,86.471) 86.718,84.951 ; J3.9 85.866,86.106 92.329,79.643 v2(92.329,78.921) ; J3.9@85.725,85.217 cw(c85.725,82.73) 87.484,84.489 ccw(c85.725,82.73) J3.9@85.725,85.217 ; J3.9@85.725,85.725 cw(c85.725,84.465) 86.616,85.356 ccw(c85.725,84.465) J3.9@85.725,85.725 ; J3.9@86.614,86.106 ccw(c88.42,86.106) 87.143,84.829 cw(c88.42,86.106) J3.9@86.614,86.106
SCK: J3.21 U1.17 | length 32.2
  Top Layer w0.508: U1.17 ccw(c90.009,79) 90.009,79.025 89.027,79.025 ccw(c89.027,78.009) 88.011,78.009 88.011,72.517 ccw(c90.551,72.517) 90.551,69.977 104.394,69.977 cw(c104.394,67.691) J3.21 ; J3.21@106.22,68.452 ccw(c106.042,68.745) 106.374,68.834 ; J3.21@106.22,68.452 ccw(c106.042,68.745) 106.374,68.834 ; J3.21@106.22,68.452 ccw(c106.042,68.745) 106.374,68.834 ; 106.374,68.834 ccw(c106.705,68.923) J3.21@106.698,68.58 ; 106.374,68.834 ccw(c106.705,68.923) J3.21@106.698,68.58 ; 106.374,68.834 ccw(c106.705,68.923) J3.21@106.698,68.58
TXD: J3.8 R4.2 | length 14.1
  Top Layer w0.762: 86.744,87.686 ccw(c85.458,87.341) J3.8 88.646,85.725 R4.2 ; 87.026,87.345 cw(c88.327,88.646) 86.487,88.646 ccw(c88.327,88.646) 87.026,87.345 ; 87.026,87.345 ccw(c85.725,86.044) 85.725,87.884 cw(c85.725,86.044) 87.026,87.345 ; 87.825,86.546 cw(c86.734,85.455) 88.277,85.455 ccw(c86.734,85.455) 87.825,86.546
VCC: ?.1 C3.2 LED1.1 LED2.1 R0.2 R3.2 R7.2 U1.4 U1.6 U1.18 | length 149.6
  Top Layer w0.254: U1.18 ccw(c90.002,78.2) 90.002,78.232 89.154,78.232 ; 99.568,75.434 99.64,75.362 99.64,72.208 cw(c98.171,72.208) 98.171,70.739 91.186,70.739 cw(c91.186,73.279) 88.646,73.279 88.646,77.724 cw(c89.154,77.724) 89.154,78.232 ; 89.154,78.232 cw(c89.154,77.988) U1.18@89.36,78.12 ; 89.154,78.232 cw(c89.154,77.988) U1.18@89.36,78.12 ; 89.154,78.232 cw(c89.154,77.988) U1.18@89.36,78.12 ; 89.204,78.232 ccw(c89.204,78.48) U1.18@89.379,78.305 ; 89.204,78.232 ccw(c89.204,78.48) U1.18@89.379,78.305 ; 89.204,78.232 ccw(c89.204,78.48) U1.18@89.379,78.305
  Top Layer w0.381: U1.6 98.514,77.319 99.282,77.319 ; 99.568,75.434 99.282,75.72 ; 99.64,75.362 100.341,74.66 107.315,74.66 ; 106.421,74.903 ccw(c106.421,75.32) v1@106.792,75.13 ; v1(106.934,75.057) 108.331,73.66 LED1.1@108.569,73.66 ; U1.4@99.056,75.755 cw(c99.282,75.613) 99.282,75.881 ; U1.4@99.056,75.755 cw(c99.282,75.613) 99.282,75.881 ; U1.4@99.056,75.755 cw(c99.282,75.613) 99.282,75.881 ; U1.4@99.056,75.845 ccw(c99.282,75.987) 99.282,75.72 ; U1.4@99.056,75.845 ccw(c99.282,75.987) 99.282,75.72 ; U1.4@99.056,75.845 ccw(c99.282,75.987) 99.282,75.72 ; U1.6@99.056,77.445 ccw(c99.282,77.587) 99.282,77.319 ; U1.6@99.056,77.445 ccw(c99.282,77.587) 99.282,77.319 ; U1.6@99.056,77.445 ccw(c99.282,77.587) 99.282,77.319 ; 99.282,75.72 98.514,75.72 U1.4 98.514,75.881 99.282,75.881 ; 99.282,75.881 99.703,76.302 99.703,76.898 99.282,77.319 ; 105.592,74.66 ccw(c105.592,76.399) v1@106.821,75.17 ; 105.592,74.66 ccw(c105.592,76.399) v1@106.821,75.17 ; 105.592,74.66 ccw(c105.592,76.399) v1@106.821,75.17 ; 106.201,74.812 cw(c106.657,74.023) v1@106.893,74.903 ; 106.201,74.812 cw(c106.657,74.023) v1@106.893,74.903 ; 106.201,74.812 cw(c106.657,74.023) v1@106.893,74.903 ; 106.511,74.66 ccw(c106.511,75.48) v1@107.091,74.9 ; 106.511,74.66 ccw(c106.511,75.48) v1@107.091,74.9 ; 106.511,74.66 ccw(c106.511,75.48) v1@107.091,74.9 ; 106.617,74.627 ccw(c106.442,74.929) v1@106.78,75.017 ; 106.617,74.627 ccw(c106.442,74.929) v1@106.78,75.017 ; 106.617,74.627 ccw(c106.442,74.929) v1@106.78,75.017 ; v1@106.934,74.898 cw(c106.934,74.512) 107.206,74.785 ; v1@106.934,74.898 cw(c106.934,74.512) 107.206,74.785 ; v1@106.934,74.898 cw(c106.934,74.512) 107.206,74.785 ; v1@107.093,75.057 ccw(c107.479,75.057) 107.206,74.785 ; v1@107.093,75.057 ccw(c107.479,75.057) 107.206,74.785 ; v1@107.093,75.057 ccw(c107.479,75.057) 107.206,74.785 ; 107.506,74.485 cw(c106.478,73.456) LED1.1@107.932,73.456 ; 107.506,74.485 cw(c106.478,73.456) LED1.1@107.932,73.456 ; 107.506,74.485 cw(c106.478,73.456) LED1.1@107.932,73.456 ; 107.731,74.26 ccw(c108.442,74.971) LED1.1@108.442,73.965 ; 107.731,74.26 ccw(c108.442,74.971) LED1.1@108.442,73.965 ; 107.731,74.26 ccw(c108.442,74.971) LED1.1@108.442,73.965
  Top Layer w0.508: R0.2@101.981,88.662 101.6,88.281 R7.2 C3.2 R3.2 105.918,85.328 v1(105.918,86.741) ; LED2.1@108.569,70.993 LED1.1@108.569,73.66 ; R7.2@101.285,85.516 ccw(c100.523,86.278) 101.6,86.278 ; R7.2@101.285,85.516 ccw(c100.523,86.278) 101.6,86.278 ; R7.2@101.285,85.516 ccw(c100.523,86.278) 101.6,86.278 ; R0.2@101.285,88.347 cw(c100.523,87.585) 101.6,87.585 ; R0.2@101.285,88.347 cw(c100.523,87.585) 101.6,87.585 ; R0.2@101.285,88.347 cw(c100.523,87.585) 101.6,87.585 ; 101.6,86.278 ccw(c102.677,86.278) R7.2@101.915,85.516 ; 101.6,86.278 ccw(c102.677,86.278) R7.2@101.915,85.516 ; 101.6,86.278 ccw(c102.677,86.278) R7.2@101.915,85.516 ; 101.6,87.585 cw(c102.677,87.585) R0.2@101.915,88.347 ; 101.6,87.585 cw(c102.677,87.585) R0.2@101.915,88.347 ; 101.6,87.585 cw(c102.677,87.585) R0.2@101.915,88.347 ; R7.2@101.965,84.886 cw(c102.727,84.124) 102.727,85.201 ; R7.2@101.965,84.886 cw(c102.727,84.124) 102.727,85.201 ; R7.2@101.965,84.886 cw(c102.727,84.124) 102.727,85.201 ; R7.2@101.965,85.516 ccw(c102.727,86.278) 102.727,85.201 ; R7.2@101.965,85.516 ccw(c102.727,86.278) 102.727,85.201 ; R7.2@101.965,85.516 ccw(c102.727,86.278) 102.727,85.201 ; 102.505,85.201 cw(c102.505,84.124) C3.2@103.267,84.886 ; 102.505,85.201 ccw(c102.505,86.278) C3.2@103.267,85.516 ; 102.505,85.201 cw(c102.505,84.124) C3.2@103.267,84.886 ; 102.505,85.201 ccw(c102.505,86.278) C3.2@103.267,85.516 ; 102.505,85.201 ccw(c102.505,86.278) C3.2@103.267,85.516 ; 102.505,85.201 cw(c102.505,84.124) C3.2@103.267,84.886 ; C3.2@103.997,84.886 cw(c104.759,84.124) 104.759,85.201 ; C3.2@103.997,84.886 cw(c104.759,84.124) 104.759,85.201 ; C3.2@103.997,84.886 cw(c104.759,84.124) 104.759,85.201 ; C3.2@103.997,85.516 ccw(c104.759,86.278) 104.759,85.201 ; C3.2@103.997,85.516 ccw(c104.759,86.278) 104.759,85.201 ; C3.2@103.997,85.516 ccw(c104.759,86.278) 104.759,85.201 ; 104.664,85.201 cw(c104.664,84.124) R3.2@105.426,84.886 ; 104.664,85.201 ccw(c104.664,86.278) R3.2@105.426,85.516 ; 104.664,85.201 cw(c104.664,84.124) R3.2@105.426,84.886 ; 104.664,85.201 ccw(c104.664,86.278) R3.2@105.426,85.516 ; 104.664,85.201 ccw(c104.664,86.278) R3.2@105.426,85.516 ; 104.664,85.201 cw(c104.664,84.124) R3.2@105.426,84.886 ; R3.2@105.526,85.516 ccw(c104.578,86.464) v1@105.918,86.464 ; R3.2@105.526,85.516 ccw(c104.578,86.464) v1@105.918,86.464 ; R3.2@105.526,85.516 ccw(c104.578,86.464) v1@105.918,86.464 ; v1@105.835,86.693 cw(c105.422,86.455) 105.883,86.331 ; v1@105.835,86.693 cw(c105.422,86.455) 105.883,86.331 ; v1@105.835,86.693 cw(c105.422,86.455) 105.883,86.331 ; v1@105.835,86.693 cw(c105.422,86.455) 105.883,86.331 ; v1@105.835,86.693 cw(c105.422,86.455) 105.883,86.331 ; v1@105.835,86.693 cw(c105.422,86.455) 105.883,86.331 ; 105.918,86.092 ccw(c106.732,86.092) R3.2@106.156,85.516 ; 105.918,86.092 ccw(c106.732,86.092) R3.2@106.156,85.516 ; 105.918,86.092 ccw(c106.732,86.092) R3.2@106.156,85.516 ; LED2.1@108.127,71.612 ccw(c107.059,72.68) LED1.1@108.569,72.68 ; LED2.1@108.127,71.612 ccw(c107.059,72.68) LED1.1@108.569,72.68 ; LED2.1@108.127,71.612 ccw(c107.059,72.68) LED1.1@108.569,72.68 ; LED1.1@108.127,73.041 cw(c107.059,71.973) LED2.1@108.569,71.973 ; LED1.1@108.127,73.041 cw(c107.059,71.973) LED2.1@108.569,71.973 ; LED1.1@108.127,73.041 cw(c107.059,71.973) LED2.1@108.569,71.973 ; LED2.1@108.253,71.701 ccw(c108.062,72.113) 108.5,72.23 ; LED2.1@108.253,71.701 ccw(c108.062,72.113) 108.5,72.23 ; LED2.1@108.253,71.701 ccw(c108.062,72.113) 108.5,72.23 ; LED2.1@108.253,71.701 ccw(c108.062,72.113) 108.5,72.23 ; LED2.1@108.253,71.701 ccw(c108.062,72.113) 108.5,72.23 ; LED1.1@108.253,72.952 cw(c108.062,72.54) 108.5,72.423 ; LED1.1@108.253,72.952 cw(c108.062,72.54) 108.5,72.423 ; LED1.1@108.253,72.952 cw(c108.062,72.54) 108.5,72.423 ; LED1.1@108.253,72.952 cw(c108.062,72.54) 108.5,72.423 ; 108.569,72.067 ccw(c109.212,72.067) LED2.1@108.757,71.612 ; 108.569,72.067 ccw(c109.212,72.067) LED2.1@108.757,71.612 ; 108.569,72.067 ccw(c109.212,72.067) LED2.1@108.757,71.612 ; 108.569,72.586 cw(c109.212,72.586) LED1.1@108.757,73.041 ; 108.569,72.586 cw(c109.212,72.586) LED1.1@108.757,73.041 ; 108.569,72.586 cw(c109.212,72.586) LED1.1@108.757,73.041
  Top Layer w0.762: 95.631,92.015 97.85,92.015 101.203,88.662 R0.2@101.981,88.662 ; 100.413,89.452 ccw(c101.55,90.589) R0.2@101.55,88.981 ; 100.413,89.452 ccw(c101.55,90.589) R0.2@101.55,88.981 ; 100.413,89.452 ccw(c101.55,90.589) R0.2@101.55,88.981
  Bottom Layer w0.508: v1(105.918,86.741) 105.918,86.614 106.934,85.598 v1(106.934,75.057) ; v1@106.014,86.741 ccw(c106.552,86.741) 106.172,86.36 ; v1@106.014,86.741 ccw(c106.552,86.741) 106.172,86.36 ; v1@106.014,86.741 ccw(c106.552,86.741) 106.172,86.36
pads on no net: Designator21.0 J3.2 J3.10 J3.11 J3.12 J3.13 J3.14 J3.15 J3.16 J3.17 J3.18 J3.22 J3.23 J3.24 J3.25 J3.26 J3.27 RESETButton.0 U1.1 U1.2 U1.9 U1.10 U1.11 U1.19 U1.20 U1.22 U1.26 U1.27 U1.28

## Polygon pours and split planes (outlines as drawn)
GND on Bottom Layer "Keep-Out Layer-No Net" (solid, pour order 4): 83.507,96.836 83.507,65.086 114.622,65.086 114.622,96.709
GND on Top Layer "Keep-Out Layer-No Net" (solid, pour order 3): 83.502,97.007 83.502,65.257 114.617,65.257 114.617,96.88 114.617,97.007

## Other copper
Top Layer:
  text "USB" at 85.344,92.837 h1
  text "ASP" at 85.344,91.44 h1
  text "MAGI" at 85.217,68.199 h1
Bottom Layer:
  text "MAGI" at 112.014,67.818 h0.8

## Silkscreen, mask and mechanical layers (free items; w line width, h text height)
Top Overlay:
  circle w0.33: c109.548,91.567 r0.18
Bottom Overlay:
  text "SelfProgram" at 107.442,92.583 h1.27 r90
  text "LowSpeed" at 104.775,92.456 h1.27 r90
  text "Power" at 102.108,92.075 h1.27 r90